# Altium PCB Behsaz maar.PcbDoc
Units mm, origin at the board's own origin, x right, y up, seen from the top; angles counter-clockwise.
Board outline 152.4 x 101.6 mm, 2 copper layers (Top Layer, Bottom Layer); 101 components, 0 nets, 650 pads, 20 vias.
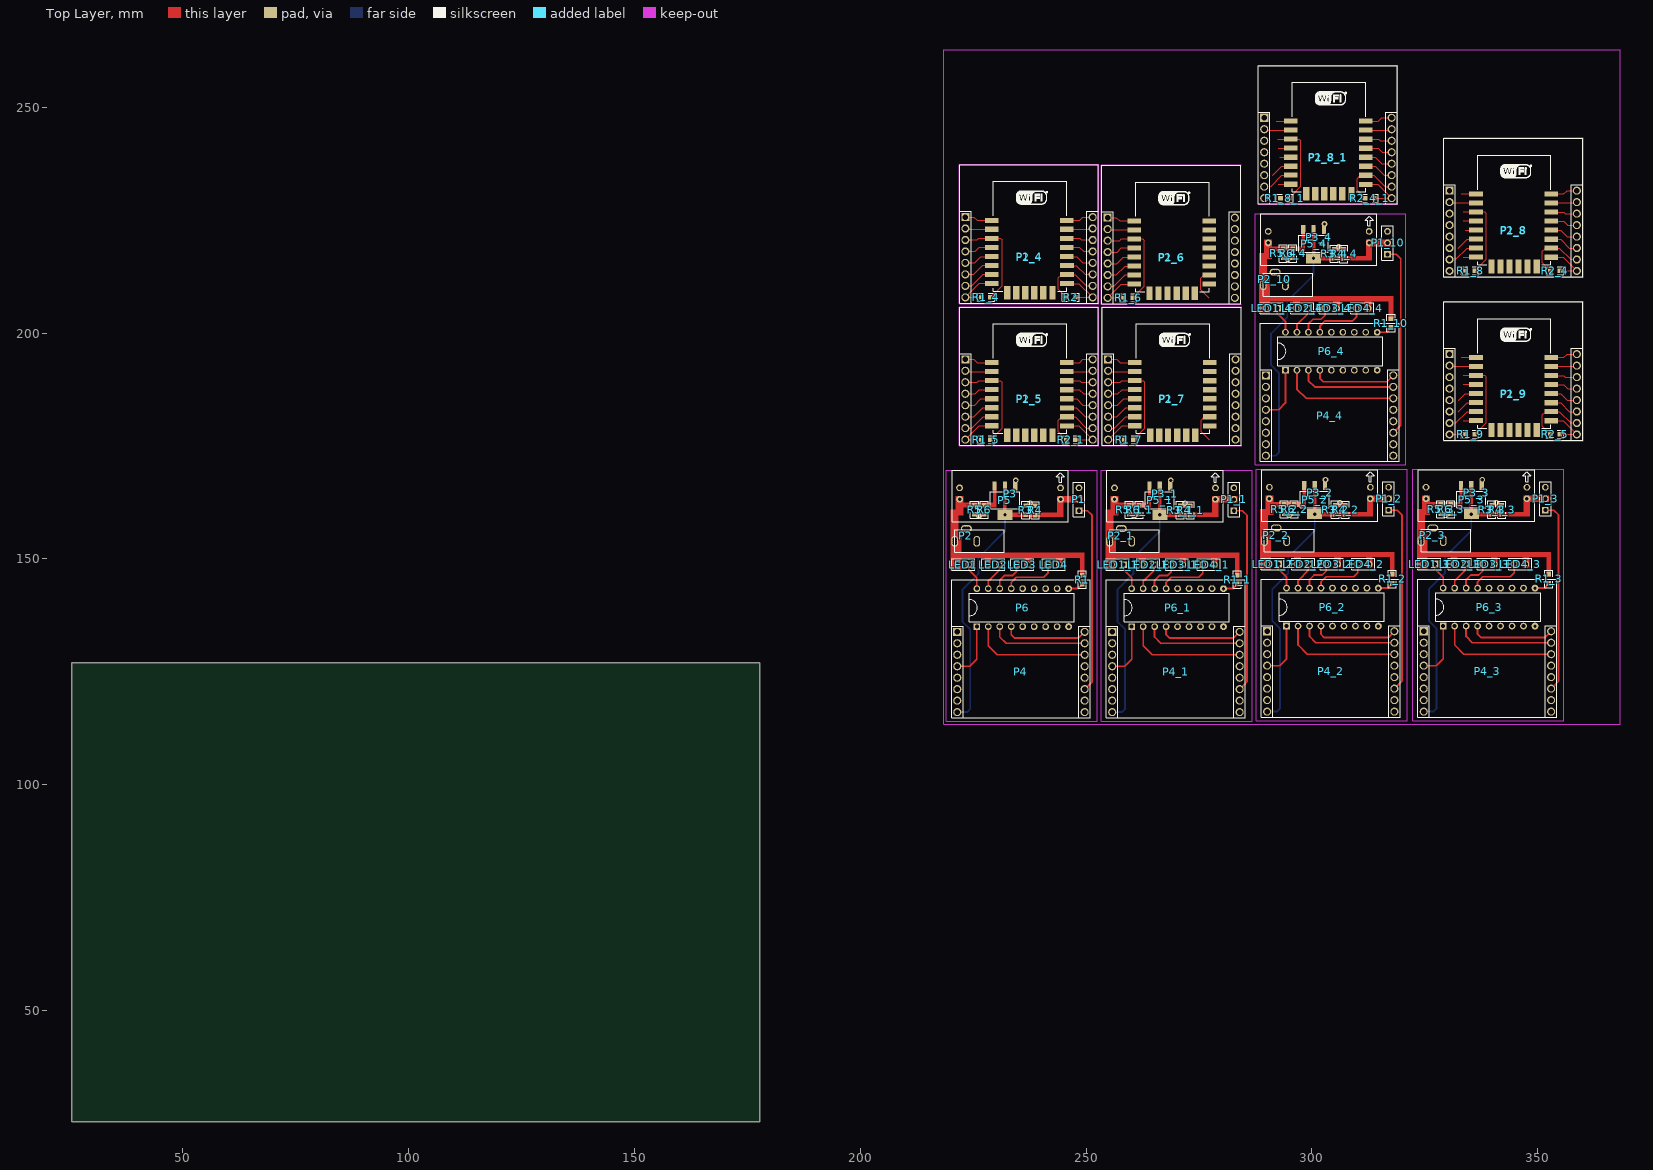
[diagram p0: Top Layer view]
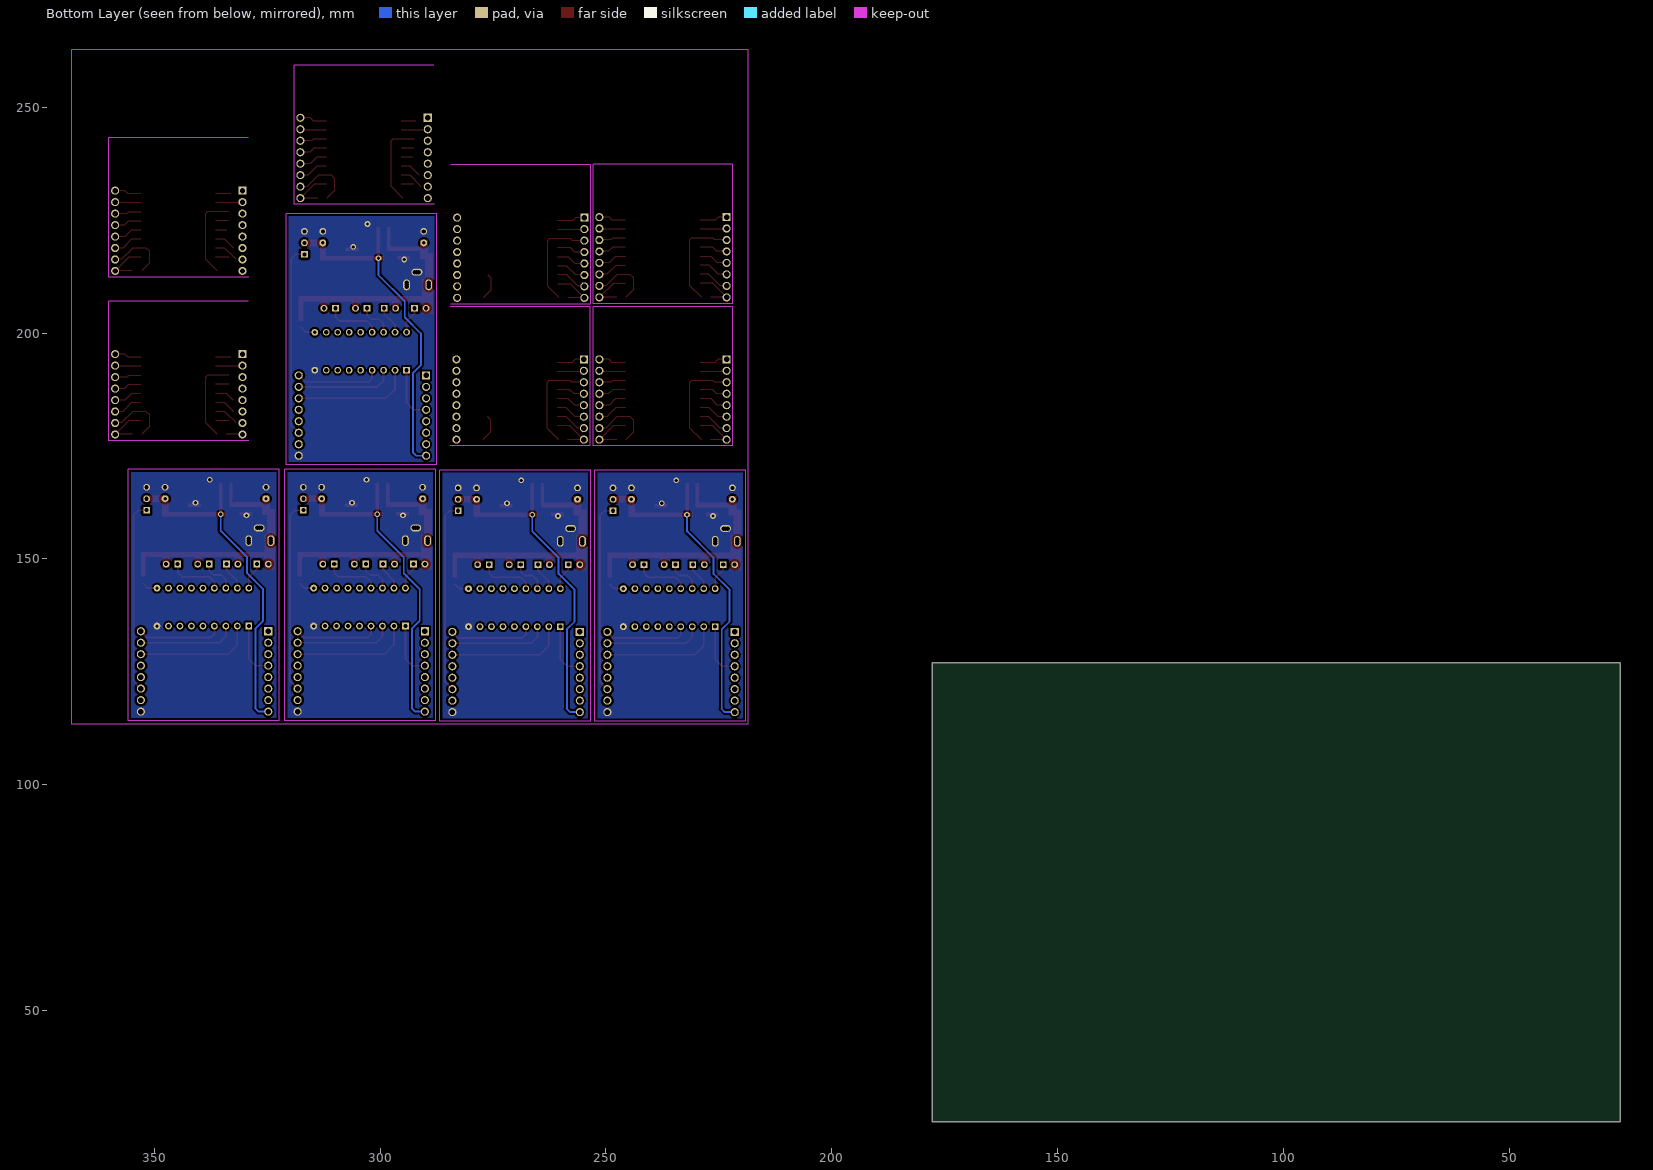
[diagram p1: Bottom Layer view, seen from below]

## Layer stack, top to bottom
Top Solder: solder mask 0.0102, Solder Resist, Dk 3.5
Top Layer: signal copper 0.0356
Dielectric 1: dielectric 0.32, FR-4, Dk 4.8
Bottom Layer: signal copper 0.0356
Bottom Solder: solder mask 0.0102, Solder Resist, Dk 3.5

## Board outline
25.4,25.4 177.8,25.4 177.8,127 25.4,127

## Design rules (kind name [scope] priority, off if disabled: settings)
Clearance [All] p1: gap=0.254 ignorepadtopadclearanceinfootprint=FALSE except(0: Arc-Hole Track-Hole SMDPad-Hole THPad-Hole Via-Hole Fill-Hole Poly-Hole Region-Hole Text-Hole)
PolygonConnect [All] p1: connectstyle=Relief reliefconductorwidth=0.254 reliefentries=4 polygonreliefangle="90 Angle" airgapwidth=0.254
RoutingVias [All] p1: holewidth=0.711 width=1.27 viastyle="Through Hole" minholewidth=0.711 minwidth=1.27 maxholewidth=0.711 maxwidth=1.27
SolderMaskExpansion [All] p1: expansion=0.102
Width [All] p1: maxlimit=0.254 minlimit=0.254 preferedwidth=0.254
30 further rules are at their usual default settings.

## Components (designator, comment, footprint, x,y, rotation, side; value= is the part's Value field where it differs from the comment)
LED1 "Header 2" HDR1X2 224.028,148.717 r180 top locked
LED1_1 "Header 2" HDR1X2 258.318,148.717 r180 top locked (schematic designator LED1)
LED1_2 "Header 2" HDR1X2 292.608,148.844 r180 top locked (schematic designator LED1)
LED1_3 "Header 2" HDR1X2 327.279,148.844 r180 top locked (schematic designator LED1)
LED1_4 "Header 2" HDR1X2 292.354,205.486 r180 top locked (schematic designator LED1)
LED2 "Header 2" HDR1X2 230.759,148.717 r180 top locked
LED2_1 "Header 2" HDR1X2 265.049,148.717 r180 top locked (schematic designator LED2)
LED2_2 "Header 2" HDR1X2 299.339,148.844 r180 top locked (schematic designator LED2)
LED2_3 "Header 2" HDR1X2 334.01,148.844 r180 top locked (schematic designator LED2)
LED2_4 "Header 2" HDR1X2 299.085,205.486 r180 top locked (schematic designator LED2)
LED3 "Header 2" HDR1X2 234.569,148.717 r0 top locked
LED3_1 "Header 2" HDR1X2 268.859,148.717 r0 top locked (schematic designator LED3)
LED3_2 "Header 2" HDR1X2 303.149,148.844 r0 top locked (schematic designator LED3)
LED3_3 "Header 2" HDR1X2 337.82,148.844 r0 top locked (schematic designator LED3)
LED3_4 "Header 2" HDR1X2 302.895,205.486 r0 top locked (schematic designator LED3)
LED4 "Header 2" HDR1X2 241.554,148.717 r0 top locked
LED4_1 "Header 2" HDR1X2 275.844,148.717 r0 top locked (schematic designator LED4)
LED4_2 "Header 2" HDR1X2 310.134,148.844 r0 top locked (schematic designator LED4)
LED4_3 "Header 2" HDR1X2 344.805,148.844 r0 top locked (schematic designator LED4)
LED4_4 "Header 2" HDR1X2 309.88,205.486 r0 top locked (schematic designator LED4)
P1 "Header 3" HDR1X3 248.412,160.655 r90 top locked
P1_1 "Header 3" HDR1X3 282.702,160.655 r90 top locked (schematic designator P1)
P1_2 "Header 3" HDR1X3 316.992,160.782 r90 top locked (schematic designator P1)
P1_3 "Header 3" HDR1X3 351.663,160.782 r90 top locked (schematic designator P1)
P1_4 "Header 8X2A" 8266 229.464,209.296 r0 top (schematic designator P1)
P1_5 "Header 8X2A" 8266 229.464,177.8 r0 top (schematic designator P1)
P1_6 "Header 8X2A" 8266 260.96,209.169 r0 top (schematic designator P1)
P1_7 "Header 8X2A" 8266 261.087,177.8 r0 top (schematic designator P1)
P1_8 "Header 8X2A" 8266 336.652,215.138 r0 top (schematic designator P1)
P1_8_1 "Header 8X2A" 8266 295.631,231.267 r0 top (schematic designator P1)
P1_9 "Header 8X2A" 8266 336.652,178.943 r0 top locked (schematic designator P1)
P1_10 "Header 3" HDR1X3 316.738,217.424 r90 top locked (schematic designator P1)
P2 "Header 3" Power 220.906,151.424 r0 top locked
P2_1 "Header 3" Power 255.196,151.424 r0 top locked (schematic designator P2)
P2_2 "Header 3" Power 289.486,151.551 r0 top locked (schematic designator P2)
P2_3 "Header 3" Power 324.157,151.551 r0 top locked (schematic designator P2)
P2_4 "Header 8X2A" M8266 221.996,206.629 r0 top (schematic designator P2)
P2_5 "Header 8X2A" M8266 221.996,175.133 r0 top (schematic designator P2)
P2_6 "Header 8X2A" M8266 253.492,206.502 r0 top (schematic designator P2)
P2_7 "Header 8X2A" M8266 253.619,175.133 r0 top (schematic designator P2)
P2_8 "Header 8X2A" M8266 329.184,212.471 r0 top (schematic designator P2)
P2_8_1 "Header 8X2A" M8266 288.163,228.6 r0 top (schematic designator P2)
P2_9 "Header 8X2A" M8266 329.184,176.276 r0 top locked (schematic designator P2)
P2_10 "Header 3" Power 289.232,208.193 r0 top locked (schematic designator P2)
P3 "Header 2X2" "3.3 kekemali" 220.323,158.195 r0 top locked
P3_1 "Header 2X2" "3.3 kekemali" 254.613,158.195 r0 top locked (schematic designator P3)
P3_2 "Header 2X2" "3.3 kekemali" 288.903,158.322 r0 top locked (schematic designator P3)
P3_3 "Header 2X2" "3.3 kekemali" 323.574,158.322 r0 top locked (schematic designator P3)
P3_4 "Header 2X2" "3.3 kekemali" 288.649,214.964 r0 top locked (schematic designator P3)
P4 "Header 8X2A" M8266 220.218,114.808 r0 top locked
P4_1 "Header 8X2A" M8266 254.508,114.808 r0 top locked (schematic designator P4)
P4_2 "Header 8X2A" M8266 288.798,114.935 r0 top locked (schematic designator P4)
P4_3 "Header 8X2A" M8266 323.469,114.935 r0 top locked (schematic designator P4)
P4_4 "Header 8X2A" M8266 288.544,171.577 r0 top locked (schematic designator P4)
P5 "Header 3" 1117 235.279,164.846 r180 top locked
P5_1 "Header 3" 1117 269.569,164.846 r180 top locked (schematic designator P5)
P5_2 "Header 3" 1117 303.859,164.973 r180 top locked (schematic designator P5)
P5_3 "Header 3" 1117 338.53,164.973 r180 top locked (schematic designator P5)
P5_4 "Header 3" 1117 303.605,221.615 r180 top locked (schematic designator P5)
P6 "Header 9X2A" ULN 247.396,135.651 r90 top locked
P6_1 "Header 9X2A" ULN 281.686,135.651 r90 top locked (schematic designator P6)
P6_2 "Header 9X2A" ULN 315.976,135.778 r90 top locked (schematic designator P6)
P6_3 "Header 9X2A" ULN 350.647,135.778 r90 top locked (schematic designator P6)
P6_4 "Header 9X2A" ULN 315.722,192.42 r90 top locked (schematic designator P6)
R1 "Res1" Res 249.174,144.431 r90 top locked value=1K
R1_1 "Res1" Res 283.464,144.431 r90 top locked value=1K (schematic designator R1)
R1_2 "Res1" Res 317.754,144.558 r90 top locked value=1K (schematic designator R1)
R1_3 "Res1" Res 352.425,144.558 r90 top locked value=1K (schematic designator R1)
R1_4 "Res1" Res 226.822,207.899 r0 top value=1K (schematic designator R1)
R1_5 "Res1" Res 226.822,176.403 r0 top value=1K (schematic designator R1)
R1_6 "Res1" Res 258.318,207.772 r0 top value=1K (schematic designator R1)
R1_7 "Res1" Res 258.445,176.403 r0 top value=1K (schematic designator R1)
R1_8 "Res1" Res 334.01,213.741 r0 top value=1K (schematic designator R1)
R1_8_1 "Res1" Res 292.989,229.87 r0 top value=1K (schematic designator R1)
R1_9 "Res1" Res 334.01,177.546 r0 top locked value=1K (schematic designator R1)
R1_10 "Res1" Res 317.5,201.2 r90 top locked value=1K (schematic designator R1)
R2 "Res1" Res 245.618,207.899 r0 top value=1K
R2_1 "Res1" Res 245.618,176.403 r0 top value=1K (schematic designator R2)
R2_4 "Res1" Res 352.806,213.741 r0 top value=1K (schematic designator R2)
R2_4_1 "Res1" Res 311.785,229.87 r0 top value=1K (schematic designator R2)
R2_5 "Res1" Res 352.806,177.546 r0 top locked value=1K (schematic designator R2)
R3 "Res1" Res 236.601,159.798 r90 top locked value=1K
R3_1 "Res1" Res 270.891,159.798 r90 top locked value=1K (schematic designator R3)
R3_2 "Res1" Res 305.181,159.925 r90 top locked value=1K (schematic designator R3)
R3_3 "Res1" Res 339.852,159.925 r90 top locked value=1K (schematic designator R3)
R3_4 "Res1" Res 304.927,216.567 r90 top locked value=1K (schematic designator R3)
R4 "Res1" Res 238.76,159.766 r90 top locked value=1K
R4_1 "Res1" Res 273.05,159.766 r90 top locked value=1K (schematic designator R4)
R4_2 "Res1" Res 307.34,159.893 r90 top locked value=1K (schematic designator R4)
R4_3 "Res1" Res 342.011,159.893 r90 top locked value=1K (schematic designator R4)
R4_4 "Res1" Res 307.086,216.535 r90 top locked value=1K (schematic designator R4)
R5 "Res1" Res 225.298,161.876 r270 top locked value=1K
R5_1 "Res1" Res 259.588,161.876 r270 top locked value=1K (schematic designator R5)
R5_2 "Res1" Res 293.878,162.003 r270 top locked value=1K (schematic designator R5)
R5_3 "Res1" Res 328.549,162.003 r270 top locked value=1K (schematic designator R5)
R5_4 "Res1" Res 293.624,218.645 r270 top locked value=1K (schematic designator R5)
R6 "Res1" Res 227.457,161.876 r270 top locked value=1K
R6_1 "Res1" Res 261.747,161.876 r270 top locked value=1K (schematic designator R6)
R6_2 "Res1" Res 296.037,162.003 r270 top locked value=1K (schematic designator R6)
R6_3 "Res1" Res 330.708,162.003 r270 top locked value=1K (schematic designator R6)
R6_4 "Res1" Res 295.783,218.645 r270 top locked value=1K (schematic designator R6)

## Footprints (in the part's own frame and the unit in brackets; to place one, negate y for a bottom-side part, rotate by r counter-clockwise, add the part's x,y. Pads: shape width x height; smd on the part's side, far side on the other; paste and mask are expansions set on the pad)
"3.3 kekemali" [mm]
  round 1.5 hole 0.9: 1(1.675,7.54) 2(24.025,7.54)
  round 1.524 hole 0.762: 3(1.675,5) 4(24.025,5)
  silkscreen extent 0,0 25.7,11.4
1117 [mm]
  rect 0.95x2 smd: 1(0.95,-1.3) 2(3.25,-1.3) 3(5.55,-1.3)
  rect 3.3x2.2 smd: 2(3.25,5.08)
  silkscreen extent 0,0 6.5,3.7
8266 [mil]
  rect 55x118.11 smd: 0(122,-16) 0(200,-16) 0(278,-16) 0(358,-16) 0(436,-16) 0(516,-16)
  rect 118.11x45 smd: 1(-13,616) 2(-13,538) 3(-13,459) 4(-13,381) 5(-13,301) 6(-13,223) 7(-13,145) 8(-13,66) 9(641,616) 10(641,538) 11(641,458) 12(641,380) 13(641,301) 14(642,222) 15(642,144) 16(642,65)
  silkscreen extent 0,0 640,955, body extent 4,7 634,951, height 86
HDR1X2 [mm] "Connector; Header; 2 Position"
  rect 1.5x1.5 hole 0.9: 1(0,0)
  round 1.5 hole 0.9: 2(2.54,0)
  silkscreen extent -1.27,-1.27 3.81,1.27
HDR1X3 [mm] "Connector; Header; 3 Position"
  rect 1.5x1.5 hole 0.9: 1(0,0)
  round 1.5 hole 0.9: 2(2.54,0) 3(5.08,0)
  silkscreen extent -1.27,-1.27 6.35,1.27
M8266 [mm]
  rect 1.8x1.8 hole 1.2: 1(1.27,19.05)
  round 1.8 hole 1.2: 2(1.27,16.51) 3(1.27,13.97) 4(1.27,11.43) 5(1.27,8.89) 6(1.27,6.35) 7(1.27,3.81) 8(1.27,1.27) 9(29.464,19.05) 10(29.464,16.51) 11(29.464,13.97) 12(29.464,11.43) 13(29.464,8.89) 14(29.464,6.35) 15(29.464,3.81) 16(29.464,1.27)
  silkscreen extent 0,0 30.73,30.61
Power [mil]
  round 60 hole 39.37: 1(0,80) 1(0,98.43) 1(0,115) 2(85,208.66) 2(102.36,208.66) 2(120,208.66) 3(192.91,80) 3(192.91,98.43) 3(192.91,115)
  silkscreen extent 0,0 433,197
Res [mm]
  rect 1.1x1 smd: 1(0,0)
  rect 1x1 smd: 2(2,0)
  silkscreen extent -0.92,-0.89 2.92,0.89
ULN [mm]
  rect 1.5x1.5 hole 0.9: 1(-0.65,21.59)
  round 1.5 hole 0.9: 2(-0.65,19.05) 3(-0.65,16.51) 4(-0.65,13.97) 5(-0.65,11.43) 6(-0.65,8.89) 7(-0.65,6.35) 8(-0.65,3.81) 10(7.75,21.59) 11(7.75,19.05) 12(7.75,16.51) 13(7.75,13.97) 14(7.75,11.43) 15(7.75,8.89) 16(7.75,6.35) 17(7.75,3.81)
  round 1.524 hole 0.762: 9(-0.65,1.27) 18(7.75,1.27)
  silkscreen extent 0.38,0 6.73,23.24

## Part data
LED1 LED1_1 LED1_2 LED1_3 LED1_4 LED2 LED2_1 LED2_2 LED2_3 LED2_4 LED3 LED3_1 LED3_2 LED3_3 LED3_4 LED4 LED4_1 LED4_2 LED4_3 LED4_4: "Header, 2-Pin", LatestRevisionDate=17-Jul-2002, LatestRevisionNote="Re-released for DXP Platform.", Publisher="Altium Limited"
P1 P1_1 P1_2 P1_3 P1_10 P2 P2_1 P2_2 P2_3 P2_10 P5 P5_1 P5_2 P5_3 P5_4: "Header, 3-Pin", LatestRevisionDate=17-Jul-2002, LatestRevisionNote="Re-released for DXP Platform.", Publisher="Altium Limited"
P1_4 P1_5 P1_6 P1_7 P1_8 P1_8_1 P1_9 P2_4 P2_5 P2_6 P2_7 P2_8 P2_8_1 P2_9 P4 P4_1 P4_2 P4_3 P4_4: "Header, 8-Pin, Dual row", LatestRevisionDate=17-Jul-2002, LatestRevisionNote="Re-released for DXP Platform.", Publisher="Altium Limited"
P3 P3_1 P3_2 P3_3 P3_4: "Header, 2-Pin, Dual row", LatestRevisionDate=17-Jul-2002, LatestRevisionNote="Re-released for DXP Platform.", Publisher="Altium Limited"
P6 P6_1 P6_2 P6_3 P6_4: "Header, 9-Pin, Dual row", LatestRevisionDate=17-Jul-2002, LatestRevisionNote="Re-released for DXP Platform.", Publisher="Altium Limited"
R1 R1_1 R1_2 R1_3 R1_4 R1_5 R1_6 R1_7 R1_8 R1_8_1 R1_9 R1_10 R2 R2_1 R2_4 R2_4_1 R2_5 R3 R3_1 R3_2 R3_3 R3_4 R4 R4_1 R4_2 R4_3 R4_4 R5 R5_1 R5_2 R5_3 R5_4 R6 R6_1 R6_2 R6_3 R6_4: "Resistor", LatestRevisionDate=17-Jul-2002, LatestRevisionNote="Re-released for DXP Platform.", PackageDescription="Axial Device, Thru-Hole; 2 Leads; 0.3 in Pin Spacing", PackageReference=AXIAL-0.3, Published=8-Jun-2000, Publisher="Altium Limited"

## Via types
v1: diameter 1.27, hole 0.711, Top Layer to Bottom Layer, 20 vias

## Nets (pads, with @x,y where several pads share a name; then routed paths per layer and width w, separated by ;. In a path a pad name is that pad's centre, name@x,y a point inside that pad or via, vN(x,y) a via of type N, cw(c..) or ccw(c..) an arc to the next point about the centre after c; other vN are vias at no path point)
pads on no net: LED1.1 LED1.2 LED1_1.1 LED1_1.2 LED1_2.1 LED1_2.2 LED1_3.1 LED1_3.2 LED1_4.1 LED1_4.2 LED2.1 LED2.2 LED2_1.1 LED2_1.2 LED2_2.1 LED2_2.2 LED2_3.1 LED2_3.2 LED2_4.1 LED2_4.2 LED3.1 LED3.2 LED3_1.1 LED3_1.2 LED3_2.1 LED3_2.2 LED3_3.1 LED3_3.2 LED3_4.1 LED3_4.2 LED4.1 LED4.2 LED4_1.1 LED4_1.2 LED4_2.1 LED4_2.2 LED4_3.1 LED4_3.2 LED4_4.1 LED4_4.2 P1.1 P1.2 P1.3 P1_1.1 P1_1.2 P1_1.3 P1_2.1 P1_2.2 P1_2.3 P1_3.1 P1_3.2 P1_3.3 P1_4.0 P1_4.1 P1_4.2 P1_4.3 P1_4.4 P1_4.5 P1_4.6 P1_4.7 P1_4.8 P1_4.9 P1_4.10 P1_4.11 P1_4.12 P1_4.13 P1_4.14 P1_4.15 P1_4.16 P1_5.0 P1_5.1 P1_5.2 P1_5.3 P1_5.4 P1_5.5 P1_5.6 P1_5.7 P1_5.8 P1_5.9 P1_5.10 P1_5.11 P1_5.12 P1_5.13 P1_5.14 P1_5.15 P1_5.16 P1_6.0 P1_6.1 P1_6.2 P1_6.3 P1_6.4 P1_6.5 P1_6.6 P1_6.7 P1_6.8 P1_6.9 P1_6.10 P1_6.11 P1_6.12 P1_6.13 P1_6.14 P1_6.15 P1_6.16 P1_7.0 P1_7.1 P1_7.2 P1_7.3 P1_7.4 P1_7.5 P1_7.6 P1_7.7 P1_7.8 P1_7.9 P1_7.10 P1_7.11 P1_7.12 P1_7.13 P1_7.14 P1_7.15 P1_7.16 P1_8.0 P1_8.1 P1_8.2 P1_8.3 P1_8.4 P1_8.5 P1_8.6 P1_8.7 P1_8.8 P1_8.9 P1_8.10 P1_8.11 P1_8.12 P1_8.13 P1_8.14 P1_8.15 P1_8.16 P1_8_1.0 P1_8_1.1 P1_8_1.2 P1_8_1.3 P1_8_1.4 P1_8_1.5 P1_8_1.6 P1_8_1.7 P1_8_1.8 P1_8_1.9 P1_8_1.10 P1_8_1.11 P1_8_1.12 P1_8_1.13 P1_8_1.14 P1_8_1.15 P1_8_1.16 P1_9.0 P1_9.1 P1_9.2 P1_9.3 P1_9.4 P1_9.5 P1_9.6 P1_9.7 P1_9.8 P1_9.9 P1_9.10 P1_9.11 P1_9.12 P1_9.13 P1_9.14 P1_9.15 P1_9.16 P1_10.1 P1_10.2 P1_10.3 P2.1 P2.2 P2.3 P2_1.1 P2_1.2 P2_1.3 P2_2.1 P2_2.2 P2_2.3 P2_3.1 P2_3.2 P2_3.3 P2_4.1 P2_4.2 P2_4.3 P2_4.4 P2_4.5 P2_4.6 P2_4.7 P2_4.8 P2_4.9 P2_4.10 P2_4.11 P2_4.12 P2_4.13 P2_4.14 P2_4.15 P2_4.16 P2_5.1 P2_5.2 P2_5.3 P2_5.4 P2_5.5 P2_5.6 P2_5.7 P2_5.8 P2_5.9 P2_5.10 P2_5.11 P2_5.12 P2_5.13 P2_5.14 P2_5.15 P2_5.16 P2_6.1 P2_6.2 P2_6.3 P2_6.4 P2_6.5 P2_6.6 P2_6.7 P2_6.8 P2_6.9 P2_6.10 P2_6.11 P2_6.12 P2_6.13 P2_6.14 P2_6.15 P2_6.16 P2_7.1 P2_7.2 P2_7.3 P2_7.4 P2_7.5 P2_7.6 P2_7.7 P2_7.8 P2_7.9 P2_7.10 P2_7.11 P2_7.12 P2_7.13 P2_7.14 P2_7.15 P2_7.16 P2_8.1 P2_8.2 P2_8.3 P2_8.4 P2_8.5 P2_8.6 P2_8.7 P2_8.8 P2_8.9 P2_8.10 P2_8.11 P2_8.12 P2_8.13 P2_8.14 P2_8.15 P2_8.16 P2_8_1.1 P2_8_1.2 P2_8_1.3 P2_8_1.4 P2_8_1.5 P2_8_1.6 P2_8_1.7 P2_8_1.8 P2_8_1.9 P2_8_1.10 P2_8_1.11 P2_8_1.12 P2_8_1.13 P2_8_1.14 P2_8_1.15 P2_8_1.16 P2_9.1 P2_9.2 P2_9.3 P2_9.4 P2_9.5 P2_9.6 P2_9.7 P2_9.8 P2_9.9 P2_9.10 P2_9.11 P2_9.12 P2_9.13 P2_9.14 P2_9.15 P2_9.16 P2_10.1 P2_10.2 P2_10.3 P3.1 P3.2 P3.3 P3.4 P3_1.1 P3_1.2 P3_1.3 P3_1.4 P3_2.1 P3_2.2 P3_2.3 P3_2.4 P3_3.1 P3_3.2 P3_3.3 P3_3.4 P3_4.1 P3_4.2 P3_4.3 P3_4.4 P4.1 P4.2 P4.3 P4.4 P4.5 P4.6 P4.7 P4.8 P4.9 P4.10 P4.11 P4.12 P4.13 P4.14 P4.15 P4.16 P4_1.1 P4_1.2 P4_1.3 P4_1.4 P4_1.5 P4_1.6 P4_1.7 P4_1.8 P4_1.9 P4_1.10 P4_1.11 P4_1.12 P4_1.13 P4_1.14 P4_1.15 P4_1.16 P4_2.1 P4_2.2 P4_2.3 P4_2.4 P4_2.5 P4_2.6 P4_2.7 P4_2.8 P4_2.9 P4_2.10 P4_2.11 P4_2.12 P4_2.13 P4_2.14 P4_2.15 P4_2.16 P4_3.1 P4_3.2 P4_3.3 P4_3.4 P4_3.5 P4_3.6 P4_3.7 P4_3.8 P4_3.9 P4_3.10 P4_3.11 P4_3.12 P4_3.13 P4_3.14 P4_3.15 P4_3.16 P4_4.1 P4_4.2 P4_4.3 P4_4.4 P4_4.5 P4_4.6 P4_4.7 P4_4.8 P4_4.9 P4_4.10 P4_4.11 P4_4.12 P4_4.13 P4_4.14 P4_4.15 P4_4.16 P5.1 P5.2 P5.3 P5_1.1 P5_1.2 P5_1.3 P5_2.1 P5_2.2 P5_2.3 P5_3.1 P5_3.2 P5_3.3 P5_4.1 P5_4.2 P5_4.3 P6.1 P6.2 P6.3 P6.4 P6.5 P6.6 P6.7 P6.8 P6.9 P6.10 P6.11 P6.12 P6.13 P6.14 P6.15 P6.16 P6.17 P6.18 P6_1.1 P6_1.2 P6_1.3 P6_1.4 P6_1.5 P6_1.6 P6_1.7 P6_1.8 P6_1.9 P6_1.10 P6_1.11 P6_1.12 P6_1.13 P6_1.14 P6_1.15 P6_1.16 P6_1.17 P6_1.18 P6_2.1 P6_2.2 P6_2.3 P6_2.4 P6_2.5 P6_2.6 P6_2.7 P6_2.8 P6_2.9 P6_2.10 P6_2.11 P6_2.12 P6_2.13 P6_2.14 P6_2.15 P6_2.16 P6_2.17 P6_2.18 P6_3.1 P6_3.2 P6_3.3 P6_3.4 P6_3.5 P6_3.6 P6_3.7 P6_3.8 P6_3.9 P6_3.10 P6_3.11 P6_3.12 P6_3.13 P6_3.14 P6_3.15 P6_3.16 P6_3.17 P6_3.18 P6_4.1 P6_4.2 P6_4.3 P6_4.4 P6_4.5 P6_4.6 P6_4.7 P6_4.8 P6_4.9 P6_4.10 P6_4.11 P6_4.12 P6_4.13 P6_4.14 P6_4.15 P6_4.16 P6_4.17 P6_4.18 R1.1 R1.2 R1_1.1 R1_1.2 R1_2.1 R1_2.2 R1_3.1 R1_3.2 R1_4.1 R1_4.2 R1_5.1 R1_5.2 R1_6.1 R1_6.2 R1_7.1 R1_7.2 R1_8.1 R1_8.2 R1_8_1.1 R1_8_1.2 R1_9.1 R1_9.2 R1_10.1 R1_10.2 R2.1 R2.2 R2_1.1 R2_1.2 R2_4.1 R2_4.2 R2_4_1.1 R2_4_1.2 R2_5.1 R2_5.2 R3.1 R3.2 R3_1.1 R3_1.2 R3_2.1 R3_2.2 R3_3.1 R3_3.2 R3_4.1 R3_4.2 R4.1 R4.2 R4_1.1 R4_1.2 R4_2.1 R4_2.2 R4_3.1 R4_3.2 R4_4.1 R4_4.2 R5.1 R5.2 R5_1.1 R5_1.2 R5_2.1 R5_2.2 R5_3.1 R5_3.2 R5_4.1 R5_4.2 R6.1 R6.2 R6_1.1 R6_1.2 R6_2.1 R6_2.2 R6_3.1 R6_3.2 R6_4.1 R6_4.2
copper on no net: | length 1790.6
  Top Layer w0.254: 223.266,178.943 224.663,178.943 227.203,181.483 229.133,181.483 ; 223.266,181.483 225.171,181.483 227.152,183.464 229.133,183.464 ; 223.266,184.023 225.298,184.023 226.72,185.445 229.133,185.445 ; 223.266,186.563 225.425,186.563 226.339,187.477 229.133,187.477 ; 223.266,189.103 225.933,189.103 226.289,189.459 229.133,189.459 231.038,189.459 231.394,189.103 231.394,178.975 228.822,176.403 ; 223.266,191.643 223.444,191.465 229.133,191.465 ; 223.266,194.183 225.171,194.183 225.908,193.446 229.133,193.446 ; 223.266,210.439 224.663,210.439 227.203,212.979 229.133,212.979 ; 223.266,212.979 225.171,212.979 227.152,214.96 229.133,214.96 ; 223.266,215.519 225.298,215.519 226.72,216.941 229.133,216.941 ; 223.266,218.059 225.425,218.059 226.339,218.973 229.133,218.973 ; 223.266,220.599 225.933,220.599 226.289,220.955 229.133,220.955 231.038,220.955 231.394,220.599 231.394,210.471 228.822,207.899 ; 223.266,223.139 223.444,222.961 229.133,222.961 ; 223.266,225.679 225.171,225.679 225.908,224.942 229.133,224.942 ; 226.822,176.403 223.266,176.403 226.339,179.476 229.133,179.476 ; 226.822,207.899 223.266,207.899 226.339,210.972 229.133,210.972 ; 245.618,176.403 243.84,178.181 243.84,180.721 244.577,181.458 245.77,181.458 247.548,181.458 250.063,178.943 251.46,178.943 ; 245.618,207.899 243.84,209.677 243.84,212.217 244.577,212.954 245.77,212.954 247.548,212.954 250.063,210.439 251.46,210.439 ; 245.745,185.445 247.879,185.445 249.301,184.023 251.46,184.023 ; 245.745,187.452 248.539,187.452 249.428,186.563 251.46,186.563 ; 245.745,189.433 248.59,189.433 248.92,189.103 251.46,189.103 ; 245.745,191.465 251.282,191.465 251.46,191.643 ; 245.745,193.446 248.564,193.446 249.301,194.183 251.46,194.183 ; 245.745,216.941 247.879,216.941 249.301,215.519 251.46,215.519 ; 245.745,218.948 248.539,218.948 249.428,218.059 251.46,218.059 ; 245.745,220.929 248.59,220.929 248.92,220.599 251.46,220.599 ; 245.745,222.961 251.282,222.961 251.46,223.139 ; 245.745,224.942 248.564,224.942 249.301,225.679 251.46,225.679 ; 245.77,179.451 248.412,179.451 251.46,176.403 247.618,176.403 ; 245.77,183.439 247.853,183.439 249.809,181.483 251.46,181.483 ; 245.77,210.947 248.412,210.947 251.46,207.899 247.618,207.899 ; 245.77,214.935 247.853,214.935 249.809,212.979 251.46,212.979 ; 254.762,210.312 256.159,210.312 258.699,212.852 260.629,212.852 ; 254.762,212.852 256.667,212.852 258.648,214.833 260.629,214.833 ; 254.762,215.392 256.794,215.392 258.216,216.814 260.629,216.814 ; 254.762,217.932 256.921,217.932 257.835,218.846 260.629,218.846 ; 254.762,220.472 257.429,220.472 257.785,220.828 260.629,220.828 262.534,220.828 262.89,220.472 262.89,210.344 260.318,207.772 ; 254.762,223.012 254.94,222.834 260.629,222.834 ; 254.762,225.552 256.667,225.552 257.404,224.815 260.629,224.815 ; 254.889,178.943 256.286,178.943 258.826,181.483 260.756,181.483 ; 254.889,181.483 256.794,181.483 258.775,183.464 260.756,183.464 ; 254.889,184.023 256.921,184.023 258.343,185.445 260.756,185.445 ; 254.889,186.563 257.048,186.563 257.962,187.477 260.756,187.477 ; 254.889,189.103 257.556,189.103 257.912,189.459 260.756,189.459 262.661,189.459 263.017,189.103 263.017,178.975 260.445,176.403 ; 254.889,191.643 255.067,191.465 260.756,191.465 ; 254.889,194.183 256.794,194.183 257.531,193.446 260.756,193.446 ; 258.318,207.772 254.762,207.772 257.835,210.845 260.629,210.845 ; 258.445,176.403 254.889,176.403 257.962,179.476 260.756,179.476 ; 276.073,212.827 275.336,212.09 275.336,209.55 277.114,207.772 ; 276.2,181.458 275.463,180.721 275.463,178.181 277.241,176.403 ; 289.611,244.932 295.3,244.932 ; 290.83,232.41 293.37,234.95 295.3,234.95 ; 291.338,234.95 293.319,236.931 295.3,236.931 ; 292.075,246.913 295.3,246.913 ; 292.456,242.926 295.3,242.926 297.205,242.926 297.561,242.57 297.561,232.442 294.989,229.87 ; 292.506,232.943 295.3,232.943 ; 292.506,240.944 295.3,240.944 ; 292.887,238.912 295.3,238.912 ; 311.785,229.87 310.007,231.648 310.007,234.188 310.744,234.925 311.937,234.925 313.715,234.925 316.23,232.41 317.627,232.41 ; 311.912,238.912 314.046,238.912 315.468,237.49 317.627,237.49 ; 311.912,240.919 314.706,240.919 315.595,240.03 317.627,240.03 ; 311.912,242.9 314.757,242.9 315.087,242.57 317.627,242.57 ; 311.912,244.932 317.449,244.932 317.627,245.11 ; 311.912,246.913 314.731,246.913 315.468,247.65 317.627,247.65 ; 311.937,232.918 314.579,232.918 317.627,229.87 313.785,229.87 ; 311.937,236.906 314.02,236.906 315.976,234.95 317.627,234.95 ; 330.454,177.546 334.01,177.546 ; 330.632,192.608 336.321,192.608 ; 330.632,228.803 336.321,228.803 ; 331.851,180.086 334.391,182.626 336.321,182.626 ; 331.851,216.281 334.391,218.821 336.321,218.821 ; 332.359,182.626 334.34,184.607 336.321,184.607 ; 332.359,218.821 334.34,220.802 336.321,220.802 ; 332.486,185.166 333.908,186.588 336.321,186.588 ; 333.096,194.589 336.321,194.589 ; 333.096,230.784 336.321,230.784 ; 333.477,190.602 336.321,190.602 338.226,190.602 338.582,190.246 338.582,180.118 336.01,177.546 ; 333.477,226.797 336.321,226.797 338.226,226.797 338.582,226.441 338.582,216.313 336.01,213.741 ; 333.527,180.619 336.321,180.619 ; 333.527,188.62 336.321,188.62 ; 333.527,216.814 336.321,216.814 ; 333.527,224.815 336.321,224.815 ; 333.908,222.783 336.321,222.783 ; 352.806,177.546 351.028,179.324 351.028,181.864 351.765,182.601 352.958,182.601 354.736,182.601 357.251,180.086 358.648,180.086 ; 352.806,213.741 351.028,215.519 351.028,218.059 351.765,218.796 352.958,218.796 354.736,218.796 357.251,216.281 358.648,216.281 ; 352.933,186.588 355.067,186.588 356.489,185.166 358.648,185.166 ; 352.933,188.595 355.727,188.595 356.616,187.706 358.648,187.706 ; 352.933,190.576 355.778,190.576 356.108,190.246 358.648,190.246 ; 352.933,192.608 358.47,192.608 358.648,192.786 ; 352.933,194.589 355.752,194.589 356.489,195.326 358.648,195.326 ; 352.933,222.783 355.067,222.783 356.489,221.361 358.648,221.361 ; 352.933,224.79 355.727,224.79 356.616,223.901 358.648,223.901 ; 352.933,226.771 355.778,226.771 356.108,226.441 358.648,226.441 ; 352.933,228.803 358.47,228.803 358.648,228.981 ; 352.933,230.784 355.752,230.784 356.489,231.521 358.648,231.521 ; 352.958,180.594 355.6,180.594 358.648,177.546 354.806,177.546 ; 352.958,184.582 355.041,184.582 356.997,182.626 358.648,182.626 ; 352.958,216.789 355.6,216.789 358.648,213.741 354.806,213.741 ; 352.958,220.777 355.041,220.777 356.997,218.821 358.648,218.821
  Top Layer w0.4: 221.488,126.238 224.282,126.238 225.806,127.762 225.806,135.001 ; 224.028,148.717 224.028,147.574 225.806,145.796 225.806,143.401 ; 228.346,135.001 228.346,130.81 230.378,128.778 249.682,128.778 ; 228.346,143.401 228.346,145.034 230.759,147.447 230.759,148.717 ; 230.886,135.001 230.886,132.715 232.283,131.318 249.682,131.318 ; 230.886,143.401 230.886,145.288 231.902,146.304 233.68,146.304 234.569,147.193 234.569,148.717 ; 233.426,135.001 233.426,133.223 234.188,132.461 248.285,132.461 249.682,133.858 ; 233.426,143.401 233.426,144.777 234.572,145.923 240.665,145.923 241.554,146.812 241.554,148.717 ; 246.126,143.401 246.14,143.415 248.158,143.415 249.174,144.431 ; 248.412,160.655 250.317,160.655 251.333,159.639 251.333,122.809 249.682,121.158 ; 255.778,126.238 258.572,126.238 260.096,127.762 260.096,135.001 ; 258.318,148.717 258.318,147.574 260.096,145.796 260.096,143.401 ; 262.636,135.001 262.636,130.81 264.668,128.778 283.972,128.778 ; 262.636,143.401 262.636,145.034 265.049,147.447 265.049,148.717 ; 265.176,135.001 265.176,132.715 266.573,131.318 283.972,131.318 ; 265.176,143.401 265.176,145.288 266.192,146.304 267.97,146.304 268.859,147.193 268.859,148.717 ; 267.716,135.001 267.716,133.223 268.478,132.461 282.575,132.461 283.972,133.858 ; 267.716,143.401 267.716,144.777 268.862,145.923 274.955,145.923 275.844,146.812 275.844,148.717 ; 280.416,143.401 280.43,143.415 282.448,143.415 283.464,144.431 ; 282.702,160.655 284.607,160.655 285.623,159.639 285.623,122.809 283.972,121.158 ; 289.814,183.007 292.608,183.007 294.132,184.531 294.132,191.77 ; 290.068,126.365 292.862,126.365 294.386,127.889 294.386,135.128 ; 292.354,205.486 292.354,204.343 294.132,202.565 294.132,200.17 ; 292.608,148.844 292.608,147.701 294.386,145.923 294.386,143.528 ; 296.672,191.77 296.672,187.579 298.704,185.547 318.008,185.547 ; 296.672,200.17 296.672,201.803 299.085,204.216 299.085,205.486 ; 296.926,135.128 296.926,130.937 298.958,128.905 318.262,128.905 ; 296.926,143.528 296.926,145.161 299.339,147.574 299.339,148.844 ; 299.212,191.77 299.212,189.484 300.609,188.087 318.008,188.087 ; 299.212,200.17 299.212,202.057 300.228,203.073 302.006,203.073 302.895,203.962 302.895,205.486 ; 299.466,135.128 299.466,132.842 300.863,131.445 318.262,131.445 ; 299.466,143.528 299.466,145.415 300.482,146.431 302.26,146.431 303.149,147.32 303.149,148.844 ; 301.752,191.77 301.752,189.992 302.514,189.23 316.611,189.23 318.008,190.627 ; 301.752,200.17 301.752,201.546 302.898,202.692 308.991,202.692 309.88,203.581 309.88,205.486 ; 302.006,135.128 302.006,133.35 302.768,132.588 316.865,132.588 318.262,133.985 ; 302.006,143.528 302.006,144.904 303.152,146.05 309.245,146.05 310.134,146.939 310.134,148.844 ; 314.452,200.17 314.466,200.184 316.484,200.184 317.5,201.2 ; 314.706,143.528 314.72,143.542 316.738,143.542 317.754,144.558 ; 316.738,217.424 318.643,217.424 319.659,216.408 319.659,179.578 318.008,177.927 ; 316.992,160.782 318.897,160.782 319.913,159.766 319.913,122.936 318.262,121.285 ; 324.739,126.365 327.533,126.365 329.057,127.889 329.057,135.128 ; 327.279,148.844 327.279,147.701 329.057,145.923 329.057,143.528 ; 331.597,135.128 331.597,130.937 333.629,128.905 352.933,128.905 ; 331.597,143.528 331.597,145.161 334.01,147.574 334.01,148.844 ; 334.137,135.128 334.137,132.842 335.534,131.445 352.933,131.445 ; 334.137,143.528 334.137,145.415 335.153,146.431 336.931,146.431 337.82,147.32 337.82,148.844 ; 336.677,135.128 336.677,133.35 337.439,132.588 351.536,132.588 352.933,133.985 ; 336.677,143.528 336.677,144.904 337.823,146.05 343.916,146.05 344.805,146.939 344.805,148.844 ; 349.377,143.528 349.391,143.542 351.409,143.542 352.425,144.558 ; 351.663,160.782 353.568,160.782 354.584,159.766 354.584,122.936 352.933,121.285
  Bottom Layer w0.4: 221.488,116.078 223.647,116.078 224.409,116.84 224.356,116.893 224.356,134.419 222.631,136.144 222.631,143.129 226.187,146.685 226.187,150.241 232.029,156.083 v1(232.029,159.766) ; 255.778,116.078 257.937,116.078 258.699,116.84 258.646,116.893 258.646,134.419 256.921,136.144 256.921,143.129 260.477,146.685 260.477,150.241 266.319,156.083 v1(266.319,159.766) ; 289.814,172.847 291.973,172.847 292.735,173.609 292.682,173.662 292.682,191.188 290.957,192.913 290.957,199.898 294.513,203.454 294.513,207.01 300.355,212.852 v1(300.355,216.535) ; 290.068,116.205 292.227,116.205 292.989,116.967 292.936,117.02 292.936,134.546 291.211,136.271 291.211,143.256 294.767,146.812 294.767,150.368 300.609,156.21 v1(300.609,159.893) ; 324.739,116.205 326.898,116.205 327.66,116.967 327.607,117.02 327.607,134.546 325.882,136.271 325.882,143.256 329.438,146.812 329.438,150.368 335.28,156.21 v1(335.28,159.893)
  other v1: 226.314,159.512 260.604,159.512 294.894,159.639 329.565,159.639 237.617,162.306 271.907,162.306 306.197,162.433 340.868,162.433 234.442,167.386 268.732,167.386 303.022,167.513 337.693,167.513 294.64,216.281 305.943,219.075 302.768,224.155

## Polygon pours and split planes (outlines as drawn)
no net on Bottom Layer "Bottom Layer-No Net" (solid, pour order 16): 287.401,226.441 320.802,226.441 320.802,170.815 287.401,170.815
no net on Bottom Layer "Bottom Layer-No Net" (solid, pour order 14): 322.326,169.799 355.727,169.799 355.727,114.173 322.326,114.173
no net on Bottom Layer "Bottom Layer-No Net" (solid, pour order 12): 287.655,169.799 321.056,169.799 321.056,114.173 287.655,114.173
no net on Bottom Layer "Bottom Layer-No Net" (solid, pour order 10): 253.365,169.672 286.766,169.672 286.766,114.046 253.365,114.046
no net on Bottom Layer "Bottom Layer-No Net" (solid, pour order 8): 219.075,169.672 252.476,169.672 252.476,114.046 219.075,114.046

## Keep-outs
Keep-Out Layer:
  lines w0.254: 284.353,206.375 253.365,206.375 253.365,237.109 253.492,237.236 284.353,237.236 ; 284.48,175.006 253.492,175.006 253.492,205.74 253.619,205.867 284.48,205.867 ; 288.036,228.473 319.024,228.473 319.024,259.334 288.163,259.334 ; 329.057,176.149 360.045,176.149 360.045,207.01 329.184,207.01 ; 329.057,212.344 360.045,212.344 360.045,243.205 329.184,243.205 ; 218.44,113.411 368.3,113.411 368.3,262.763 218.44,262.763 218.44,113.411 ; 219.075,114.046 219.075,169.672 252.476,169.672 252.476,114.046 219.075,114.046 ; 221.869,175.006 221.869,205.74 221.996,205.867 252.857,205.867 252.857,175.006 221.869,175.006 ; 221.869,206.502 221.869,237.236 221.996,237.363 252.857,237.363 252.857,206.502 221.869,206.502 ; 253.365,114.046 253.365,169.672 286.766,169.672 286.766,114.046 253.365,114.046 ; 287.401,170.815 287.401,226.441 320.802,226.441 320.802,170.815 287.401,170.815 ; 287.655,114.173 287.655,169.799 321.056,169.799 321.056,114.173 287.655,114.173 ; 322.326,114.173 322.326,169.799 355.727,169.799 355.727,114.173 322.326,114.173

## Other copper
Top Layer:
  rectangle: 288.29,204.216 290.703,212.09
  rectangle: 289.232,207.01 318.008,208.193
  rectangle: 316.992,202.692 318.008,208.153
  rectangle: 304.673,204.724 306.197,207.137
  rectangle: 311.658,204.724 313.182,207.264
  rectangle: 299.085,216.027 313.309,217.043
  rectangle: 289.433,217.678 291.211,220.726
  rectangle: 288.29,216.408 291.211,217.678
  rectangle: 288.29,209.042 290.068,217.678
  rectangle: 290.83,218.186 298.45,219.202
  rectangle: 297.688,218.186 298.45,223.52
  rectangle: 299.974,216.027 300.736,223.52
  rectangle: 304.673,218.186 307.594,218.948
  rectangle: 293.37,216.281 296.164,217.043
  rectangle: 295.783,204.724 297.307,207.391
  rectangle: 311.912,219.202 317.5,220.726
  rectangle: 311.912,216.027 313.309,220.726
  rectangle: 323.215,147.574 325.628,155.448
  rectangle: 324.157,150.368 352.933,151.551
  rectangle: 351.917,146.05 352.933,151.511
  rectangle: 339.598,148.082 341.122,150.495
  rectangle: 346.583,148.082 348.107,150.622
  rectangle: 334.01,159.385 348.234,160.401
  rectangle: 324.358,161.036 326.136,164.084
  rectangle: 323.215,159.766 326.136,161.036
  rectangle: 323.215,152.4 324.993,161.036
  rectangle: 325.755,161.544 333.375,162.56
  rectangle: 332.613,161.544 333.375,166.878
  rectangle: 334.899,159.385 335.661,166.878
  rectangle: 339.598,161.544 342.519,162.306
  rectangle: 328.295,159.639 331.089,160.401
  rectangle: 330.708,148.082 332.232,150.749
  rectangle: 346.837,162.56 352.425,164.084
  rectangle: 346.837,159.385 348.234,164.084
  rectangle: 288.544,147.574 290.957,155.448
  rectangle: 289.486,150.368 318.262,151.551
  rectangle: 317.246,146.05 318.262,151.511
  rectangle: 304.927,148.082 306.451,150.495
  rectangle: 311.912,148.082 313.436,150.622
  rectangle: 299.339,159.385 313.563,160.401
  rectangle: 289.687,161.036 291.465,164.084
  rectangle: 288.544,159.766 291.465,161.036
  rectangle: 288.544,152.4 290.322,161.036
  rectangle: 291.084,161.544 298.704,162.56
  rectangle: 297.942,161.544 298.704,166.878
  rectangle: 300.228,159.385 300.99,166.878
  rectangle: 304.927,161.544 307.848,162.306
  rectangle: 293.624,159.639 296.418,160.401
  rectangle: 296.037,148.082 297.561,150.749
  rectangle: 312.166,162.56 317.754,164.084
  rectangle: 312.166,159.385 313.563,164.084
  rectangle: 254.254,147.447 256.667,155.321
  rectangle: 255.196,150.241 283.972,151.424
  rectangle: 282.956,145.923 283.972,151.384
  rectangle: 270.637,147.955 272.161,150.368
  rectangle: 277.622,147.955 279.146,150.495
  rectangle: 265.049,159.258 279.273,160.274
  rectangle: 255.397,160.909 257.175,163.957
  rectangle: 254.254,159.639 257.175,160.909
  rectangle: 254.254,152.273 256.032,160.909
  rectangle: 256.794,161.417 264.414,162.433
  rectangle: 263.652,161.417 264.414,166.751
  rectangle: 265.938,159.258 266.7,166.751
  rectangle: 270.637,161.417 273.558,162.179
  rectangle: 259.334,159.512 262.128,160.274
  rectangle: 261.747,147.955 263.271,150.622
  rectangle: 277.876,162.433 283.464,163.957
  rectangle: 277.876,159.258 279.273,163.957
  rectangle: 219.964,147.447 222.377,155.321
  rectangle: 220.906,150.241 249.682,151.424
  rectangle: 248.666,145.923 249.682,151.384
  rectangle: 236.347,147.955 237.871,150.368
  rectangle: 243.332,147.955 244.856,150.495
  rectangle: 230.759,159.258 244.983,160.274
  rectangle: 221.107,160.909 222.885,163.957
  rectangle: 219.964,159.639 222.885,160.909
  rectangle: 219.964,152.273 221.742,160.909
  rectangle: 222.504,161.417 230.124,162.433
  rectangle: 229.362,161.417 230.124,166.751
  rectangle: 231.648,159.258 232.41,166.751
  rectangle: 236.347,161.417 239.268,162.179
  rectangle: 225.044,159.512 227.838,160.274
  rectangle: 227.457,147.955 228.981,150.622
  rectangle: 243.586,162.433 249.174,163.957
  rectangle: 243.586,159.258 244.983,163.957